# Altium PCB button pcb.PcbDoc
Units mm, origin at the board's own origin, x right, y up, seen from the top; angles counter-clockwise.
Board outline 152.4 x 101.6 mm, 2 copper layers (Top Layer, Bottom Layer); 16 components, 0 nets, 80 pads, 0 vias.
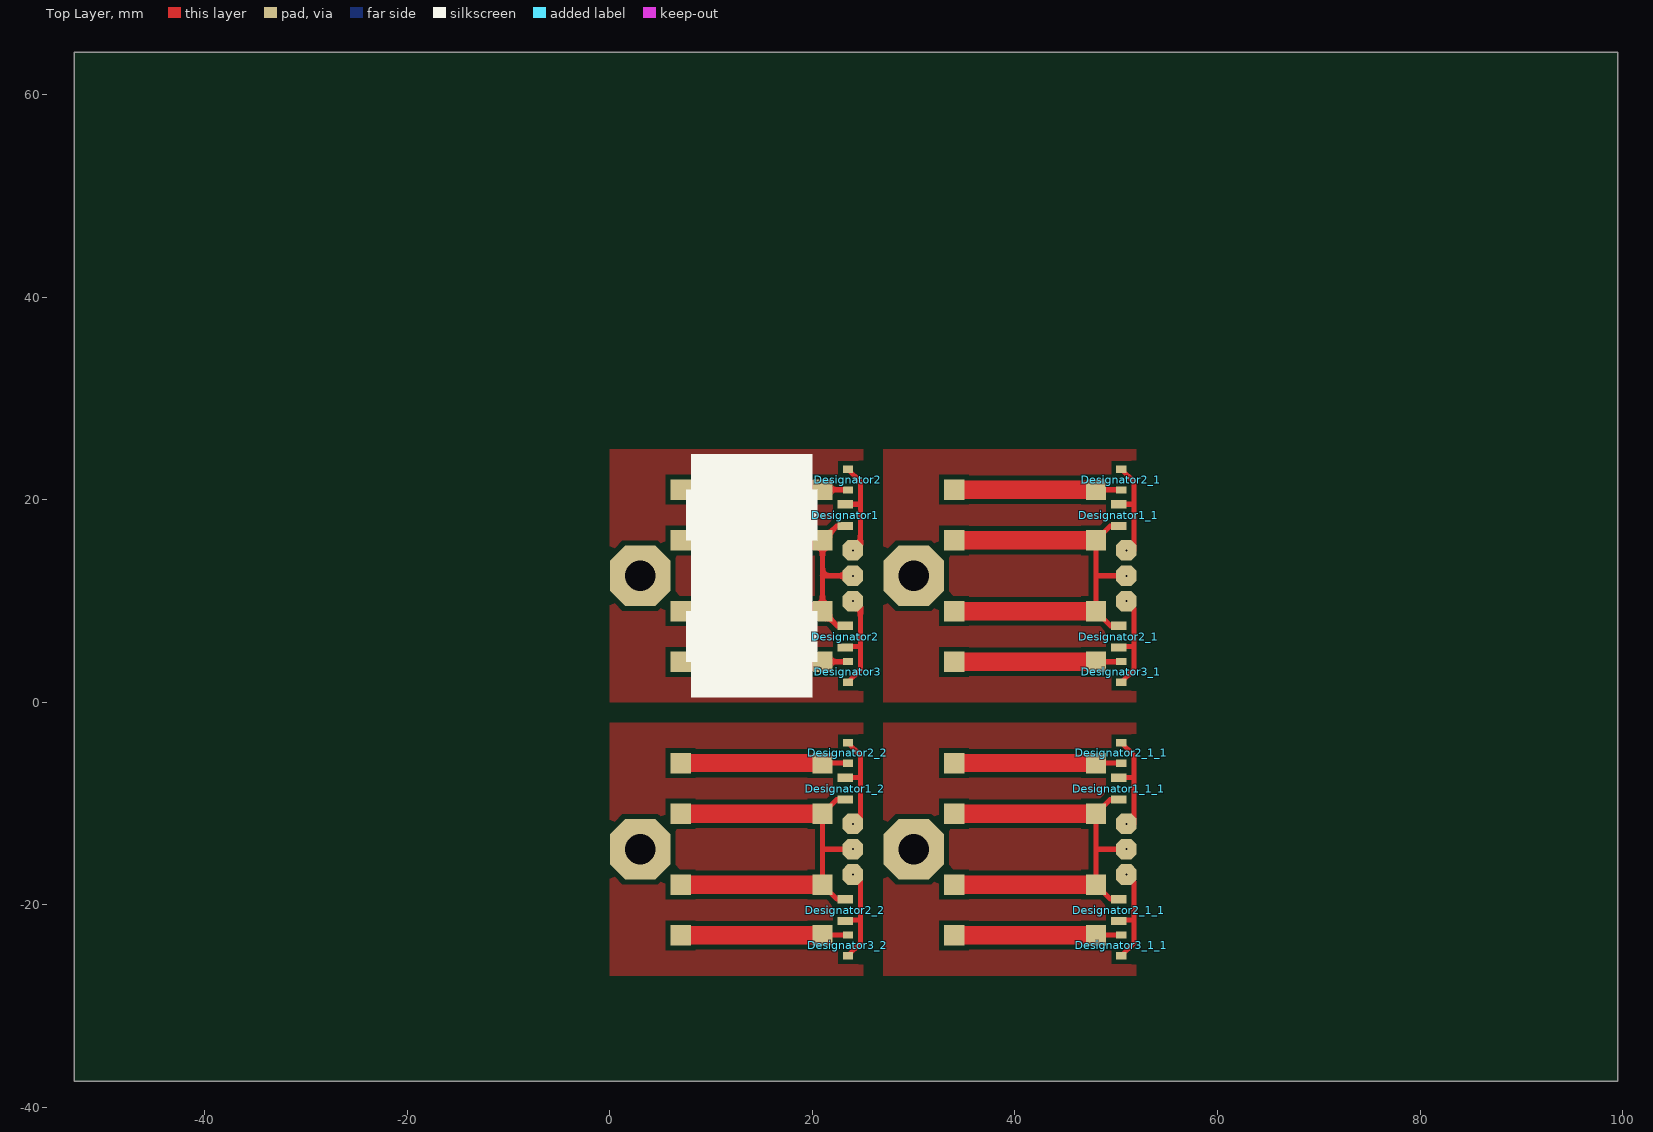
[diagram p0: Top Layer view]
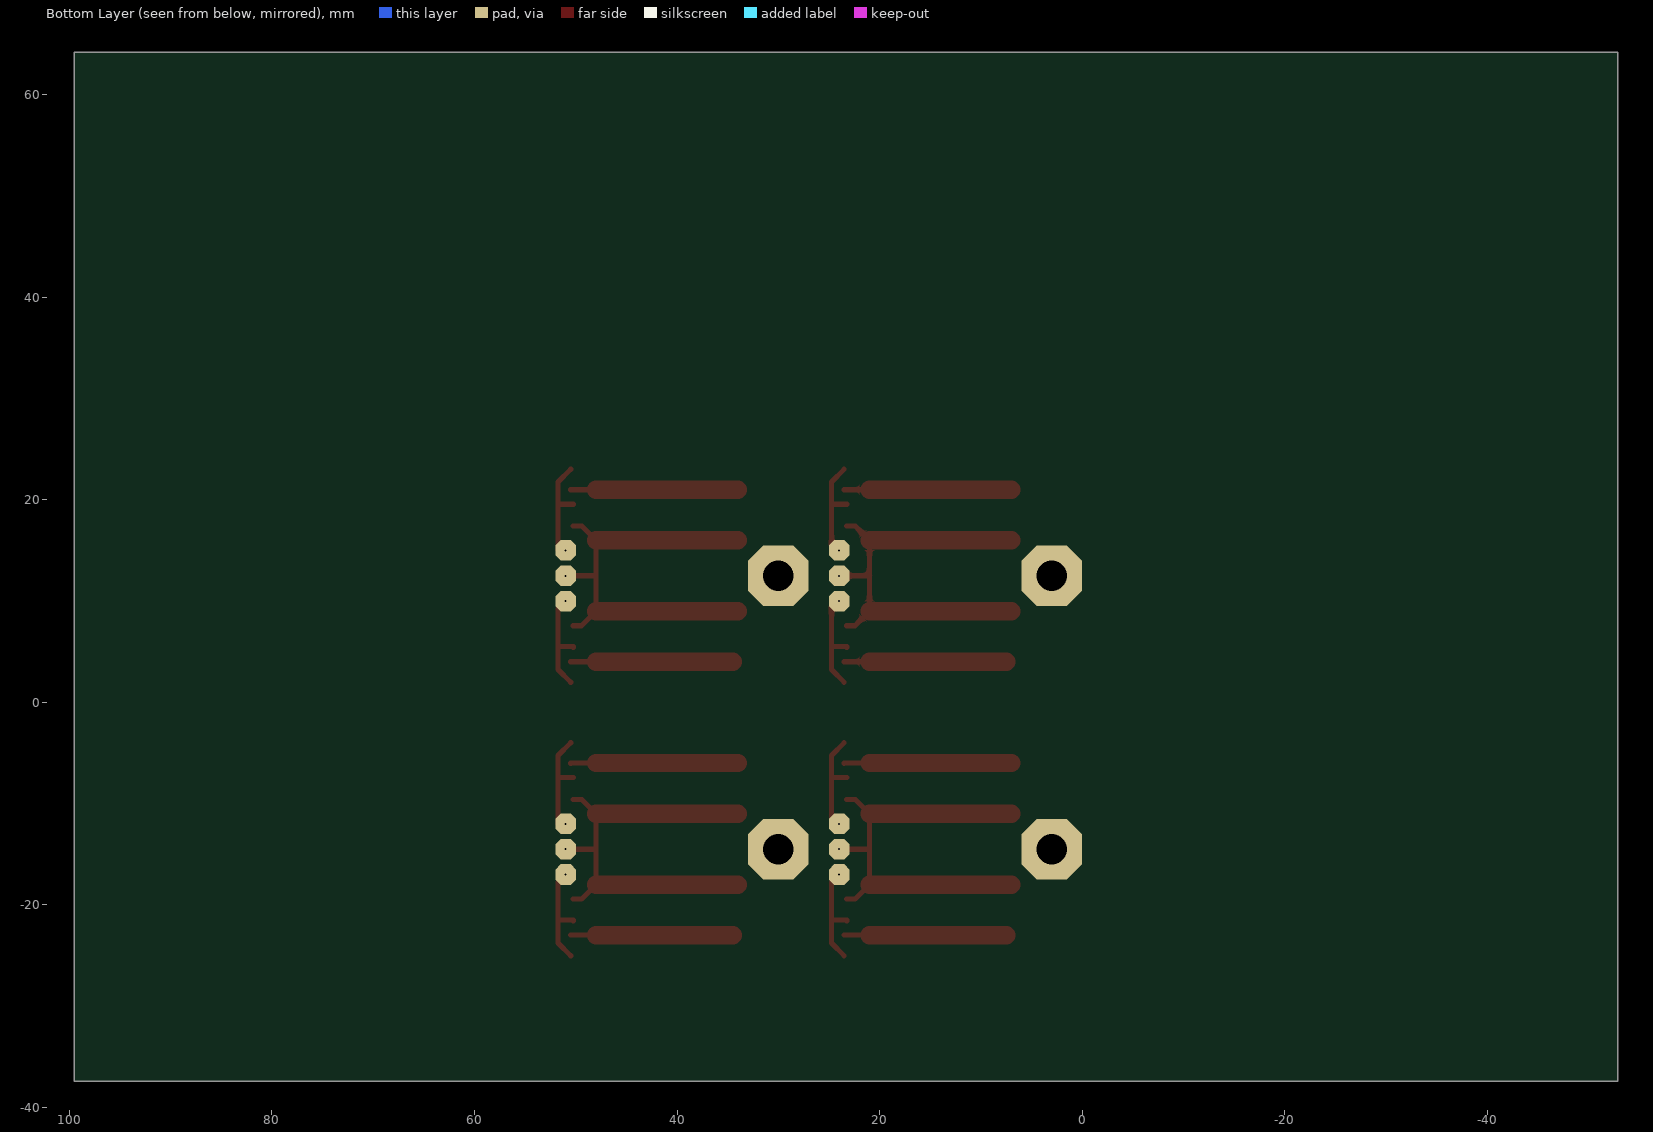
[diagram p1: Bottom Layer view, seen from below]

## Layer stack, top to bottom
Top Solder: solder mask 0.0102, Solder Resist, Dk 3.5
Top Layer: signal copper 0.0356
Dielectric 1: dielectric 0.32, FR-4, Dk 4.8
Bottom Layer: signal copper 0.0356
Bottom Solder: solder mask 0.0102, Solder Resist, Dk 3.5

## Board outline
-52.88,-37.411 99.52,-37.411 99.52,64.189 -52.88,64.189

## Design rules (kind name [scope] priority, off if disabled: settings)
Clearance [All] p1: gap=0.254 except(0.508: Arc-Poly Track-Poly SMDPad-Poly THPad-Poly Via-Poly Fill-Poly Poly-Poly)
PolygonConnect [All] p1: connectstyle=Relief reliefconductorwidth=0.254 reliefentries=4 polygonreliefangle="90 Angle" airgapwidth=0.254
RoutingVias [All] p1: holewidth=0.711 width=1.27 viastyle="Through Hole" minholewidth=0.711 minwidth=1.27 maxholewidth=0.711 maxwidth=1.27
SolderMaskExpansion [All] p1: expansion=0.102
Width [All] p1: maxlimit=2.54 minlimit=0.254 preferedwidth=0.254
30 further rules are at their usual default settings.

## Components (designator, comment, footprint, x,y, rotation, side; value= is the part's Value field where it differs from the comment)
Designator1 "Comment" 0805x 23.25,18.5 r90 top
Designator1_1 "Comment" 0805x 50.25,18.5 r90 top
Designator1_1_1 "Comment" 0805x 50.25,-8.5 r90 top
Designator1_2 "Comment" 0805x 23.25,-8.5 r90 top
Designator2 "Comment" 0603x 23.5,22 r90 top
Designator2 "Comment" 0805x 23.25,6.5 r90 top
Designator2_1 "Comment" 0805x 50.25,6.5 r90 top
Designator2_1 "Comment" 0603x 50.5,22 r90 top
Designator2_1_1 "Comment" 0603x 50.5,-5 r90 top
Designator2_1_1 "Comment" 0805x 50.25,-20.5 r90 top
Designator2_2 "Comment" 0805x 23.25,-20.5 r90 top
Designator2_2 "Comment" 0603x 23.5,-5 r90 top
Designator3 "Comment" 0603x 23.5,3 r90 top
Designator3_1 "Comment" 0603x 50.5,3 r90 top
Designator3_1_1 "Comment" 0603x 50.5,-24 r90 top
Designator3_2 "Comment" 0603x 23.5,-24 r90 top

## Footprints (in the part's own frame and the unit in brackets; to place one, negate y for a bottom-side part, rotate by r counter-clockwise, add the part's x,y. Pads: shape width x height; smd on the part's side, far side on the other; paste and mask are expansions set on the pad)
0603x [mm] "Chip Resistor; Body 1.6 x 0.8 mm (LxW typ)"
  rect 0.7x1 smd: 1(-1.016,0) 2(1.016,0)
0805x [mil] "Chip Resistor; Body 2 x 1.3 mm (LxW typ)"
  rect 33x59.06 smd: 1(42,0)
  rect 30x59.06 smd: 2(-43,0)

## Free pads (board coordinates)
  oct 6x6 hole 3: 0(3,-14.5) 0(3,12.5) 0(30,-14.5) 0(30,12.5)
  rect 2x2 smd: 1(21,-6) 1(21,21) 1(48,-6) 1(48,21) 2(21,-11) 2(21,16) 2(48,-11) 2(48,16) 3(21,-18) 3(21,9) 3(48,-18) 3(48,9) 4(21,-23) 4(21,4) 4(48,-23) 4(48,4) 5(7,-23) 5(7,4) 5(34,-23) 5(34,4) 6(7,-18) 6(7,9) 6(34,-18) 6(34,9) 7(7,-11) 7(7,16) 7(34,-11) 7(34,16) 8(7,-6) 8(7,21) 8(34,-6) 8(34,21)
  oct 2.032x2.032 hole 0.2: 9(24,-14.5) 9(24,12.5) 9(51,-14.5) 9(51,12.5) 10(24,-12) 10(24,15) 10(51,-12) 10(51,15) 11(24,-17) 11(24,10) 11(51,-17) 11(51,10)

## Nets (pads, with @x,y where several pads share a name; then routed paths per layer and width w, separated by ;. In a path a pad name is that pad's centre, name@x,y a point inside that pad or via, vN(x,y) a via of type N, cw(c..) or ccw(c..) an arc to the next point about the centre after c; other vN are vias at no path point)
pads on no net: Designator1.1 Designator1.2 Designator1_1.1 Designator1_1.2 Designator1_1_1.1 Designator1_1_1.2 Designator1_2.1 Designator1_2.2 Designator2.1 Designator2.2 Designator2_1.1 Designator2_1.2 Designator2_1_1.1 Designator2_1_1.2 Designator2_2.1 Designator2_2.2 Designator3.1 Designator3.2 Designator3_1.1 Designator3_1.2 Designator3_1_1.1 Designator3_1_1.2 Designator3_2.1 Designator3_2.2
copper on no net: | length 409.3
  Top Layer w0.508: 21,-23 21,-22.984 23.5,-22.984 ; 21,-18.25 21,-11 22.408,-9.592 23.25,-9.592 ; 21,-18 22.433,-19.433 23.25,-19.433 ; 21,-14.513 21,-14.5 24,-14.5 ; 21,-6 23.5,-6 23.5,-6.016 ; 21,4 21,4.016 23.5,4.016 ; 21,8.75 21,16 22.408,17.408 23.25,17.408 ; 21,9 22.433,7.567 23.25,7.567 ; 21,12.487 21,12.5 24,12.5 ; 21,21 23.5,21 23.5,20.984 ; 23.25,-21.592 23.25,-21.5 24.75,-21.5 ; 23.25,-7.433 24.75,-7.433 24.75,-7.5 ; 23.25,5.408 23.25,5.5 24.75,5.5 ; 23.25,19.567 24.75,19.567 24.75,19.5 ; 24,-17 24.75,-17.75 24.75,-23.766 ; 24,-12 24.75,-12 24.75,-5.234 ; 24,10 24.75,9.25 24.75,3.234 ; 24,15 24.75,15 24.75,21.766 ; 24.75,-23.75 24.75,-23.766 ; 24.75,-6.25 24.75,-5.234 ; 24.75,3.25 24.75,3.234 ; 24.75,20.75 24.75,21.766 ; 48,-23 48,-22.984 50.5,-22.984 ; 48,-18.25 48,-11 49.408,-9.592 50.25,-9.592 ; 48,-18 49.433,-19.433 50.25,-19.433 ; 48,-14.513 48,-14.5 51,-14.5 ; 48,-6 50.5,-6 50.5,-6.016 ; 48,4 48,4.016 50.5,4.016 ; 48,8.75 48,16 49.408,17.408 50.25,17.408 ; 48,9 49.433,7.567 50.25,7.567 ; 48,12.487 48,12.5 51,12.5 ; 48,21 50.5,21 50.5,20.984 ; 50.25,-21.592 50.25,-21.5 51.75,-21.5 ; 50.25,-7.433 51.75,-7.433 51.75,-7.5 ; 50.25,5.408 50.25,5.5 51.75,5.5 ; 50.25,19.567 51.75,19.567 51.75,19.5 ; 51,-17 51.75,-17.75 51.75,-23.766 ; 51,-12 51.75,-12 51.75,-5.234 ; 51,10 51.75,9.25 51.75,3.234 ; 51,15 51.75,15 51.75,21.766 ; 51.75,-23.75 51.75,-23.766 ; 51.75,-6.25 51.75,-5.234 ; 51.75,3.25 51.75,3.234 ; 51.75,20.75 51.75,21.766 ; 24.75,-23.766 23.5,-25.016 24.75,-23.766 ; 24.75,-5.234 23.5,-3.984 24.75,-5.234 ; 24.75,3.234 23.5,1.984 24.75,3.234 ; 24.75,21.766 23.5,23.016 24.75,21.766 ; 51.75,-23.766 50.5,-25.016 51.75,-23.766 ; 51.75,-5.234 50.5,-3.984 51.75,-5.234 ; 51.75,3.234 50.5,1.984 51.75,3.234 ; 51.75,21.766 50.5,23.016 51.75,21.766
  Top Layer w1.8: 7,-18 21,-18 ; 7,-11 21,-11 ; 7,-6 21,-6 ; 7,9 21,9 ; 7,16 21,16 ; 7,21 21,21 ; 7.5,-23 21,-23 ; 7.5,4 21,4 ; 34,-18 48,-18 ; 34,-11 48,-11 ; 34,-6 48,-6 ; 34,9 48,9 ; 34,16 48,16 ; 34,21 48,21 ; 34.5,-23 48,-23 ; 34.5,4 48,4

## Polygon pours and split planes (outlines as drawn)
no net on Top Layer "Top Layer-No Net" (solid, pour order 6): 0,-2 0,-27 25,-27 25,-2
no net on Top Layer "Top Layer-No Net" (solid, pour order 4): 27,-2 27,-27 52,-27 52,-2
no net on Top Layer "Top Layer-No Net" (solid, pour order 2): 27,25 27,0 52,0 52,25
no net on Top Layer "Top Layer-No Net" (solid, pour order 0): 0,25 0,0 25,0 25,25

## Silkscreen, mask and mechanical layers (free items; w line width, h text height)
Top Overlay:
  rectangle: 7.5,4 20.5,9
  rectangle: 7.5,16 20.5,21
  rectangle: 8,0.5 20,12.5
  rectangle: 8,12.5 20,24.5